# Altium PCB Placa_Alimentación_v2.PcbDoc
Units mil, origin at the board's own origin, x right, y up, seen from the top; angles counter-clockwise.
Board outline 3937.01 x 2755.91 mil, 2 copper layers (Top Layer, Bottom Layer); 155 components, 79 nets, 550 pads, 0 vias.
Unrouted connection lines stored in the file: 384.
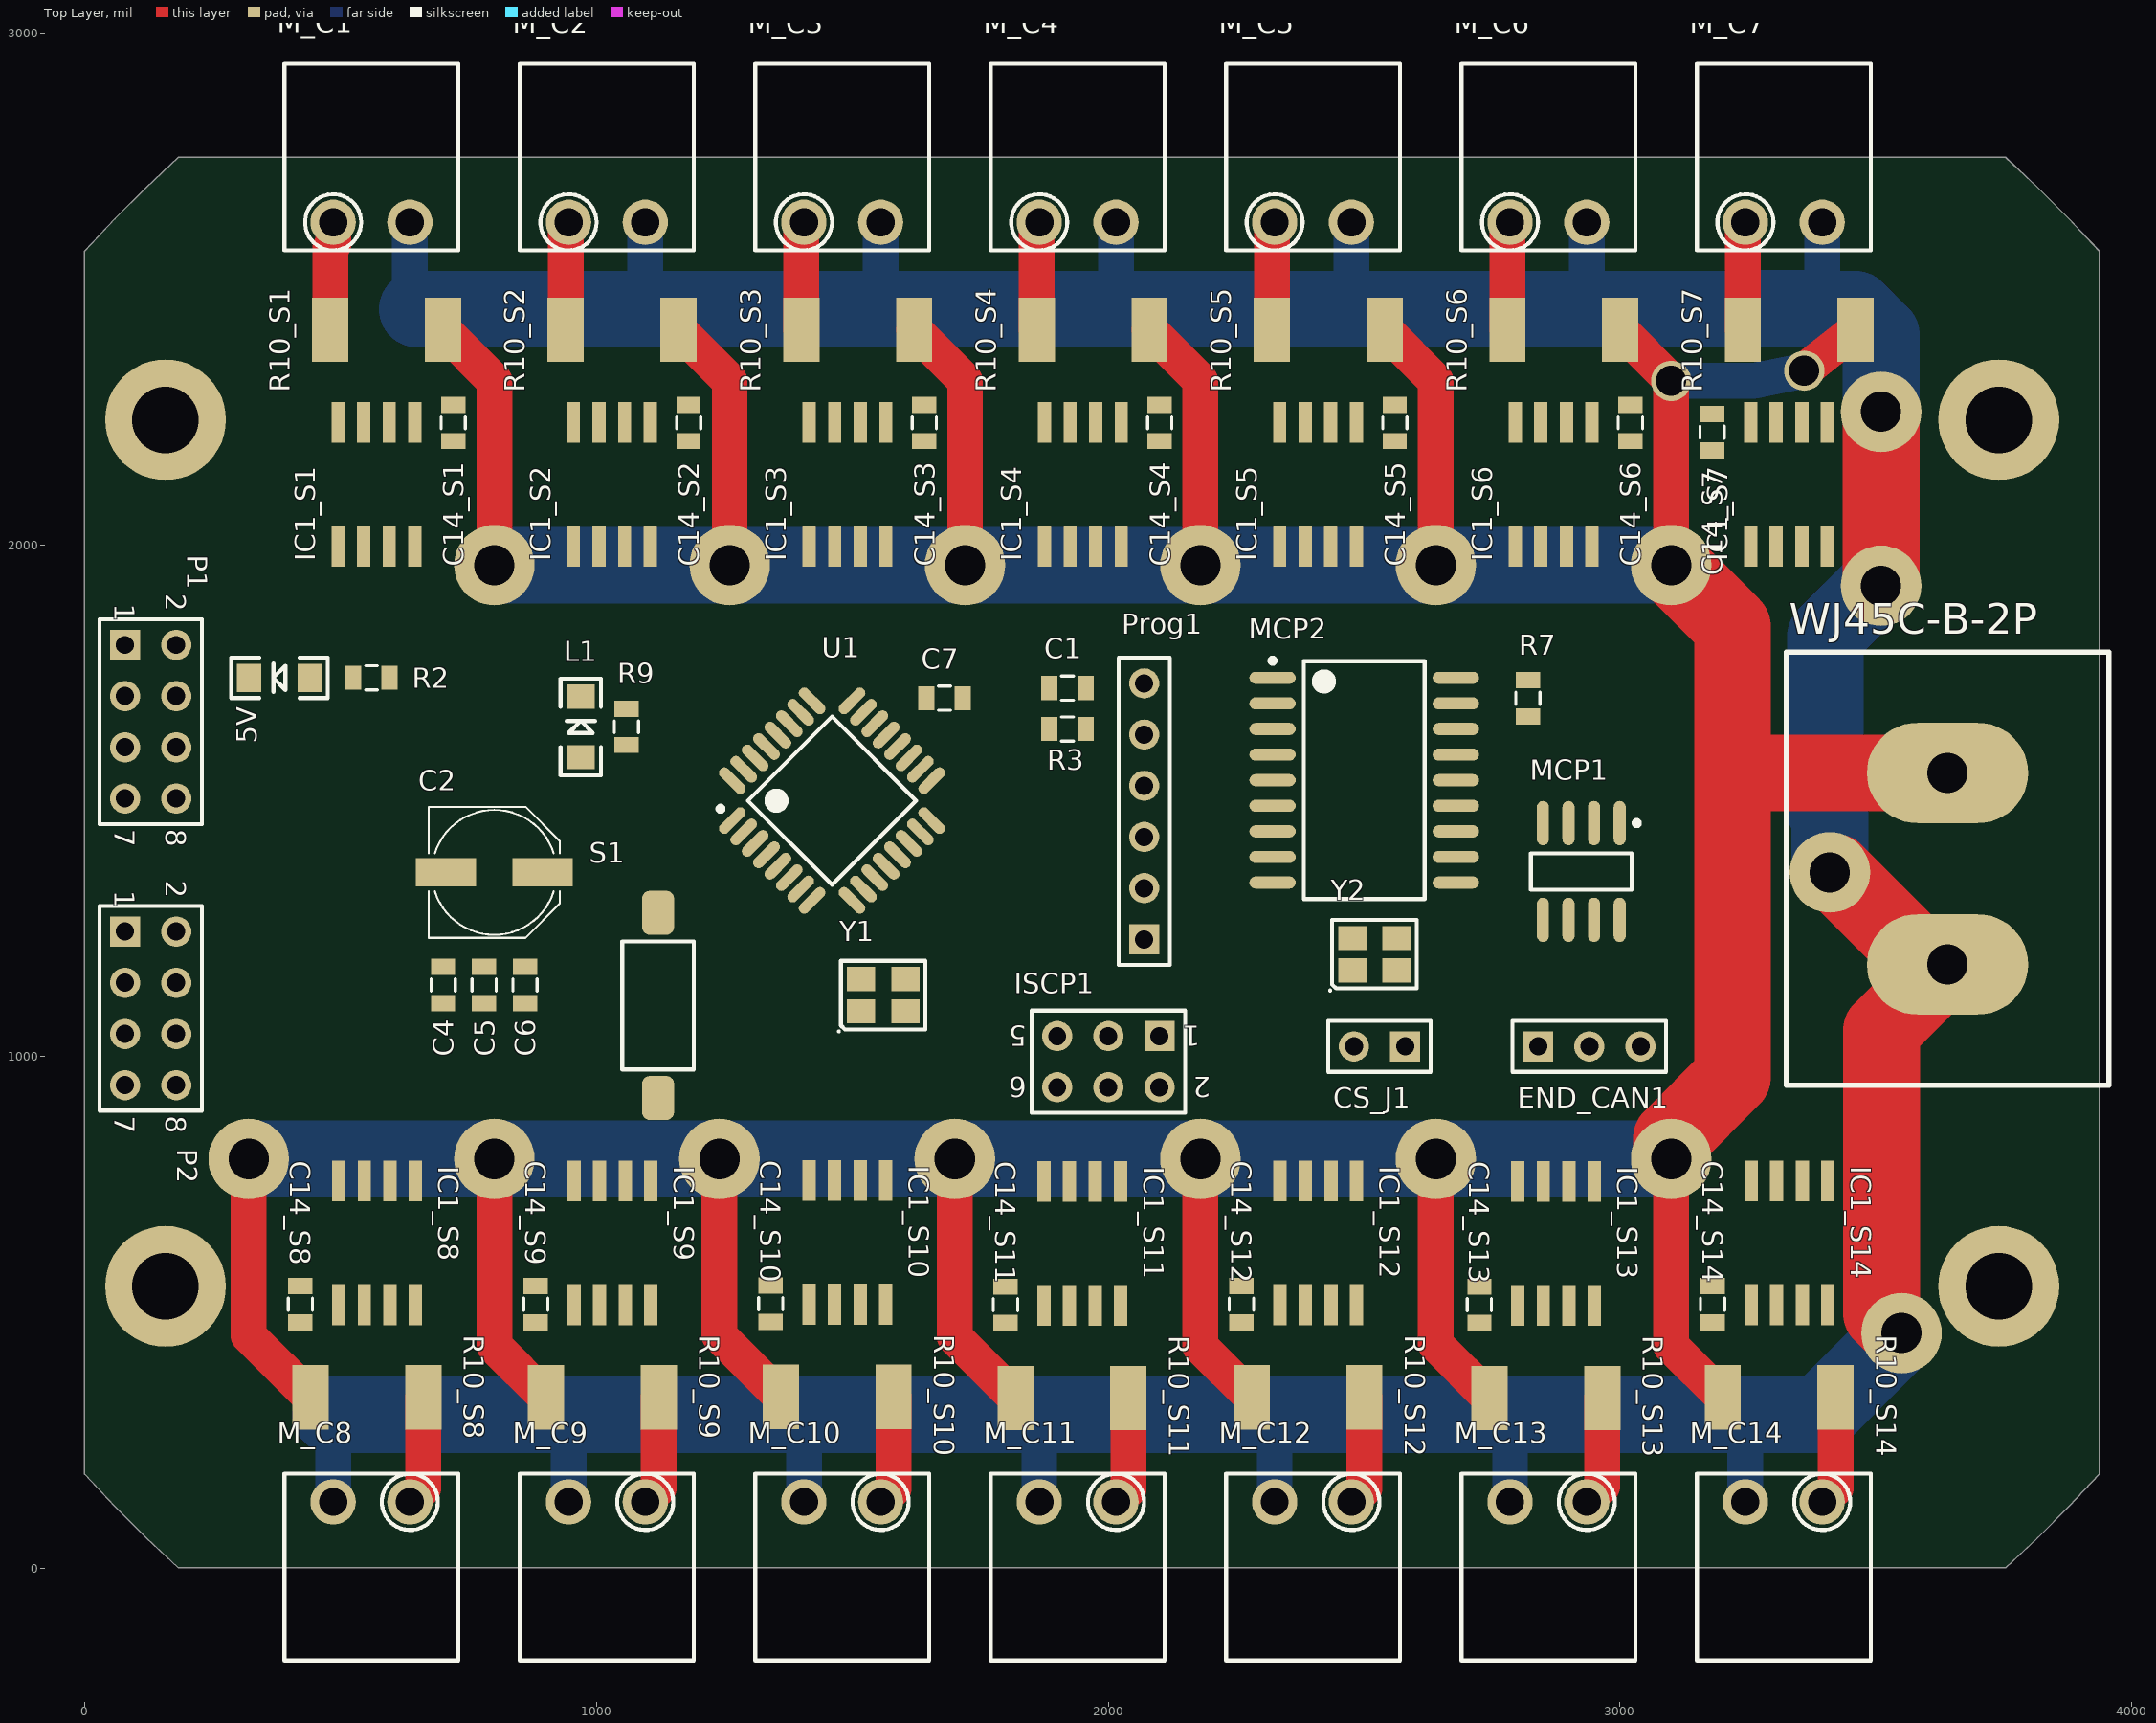
[diagram p0: Top Layer view]
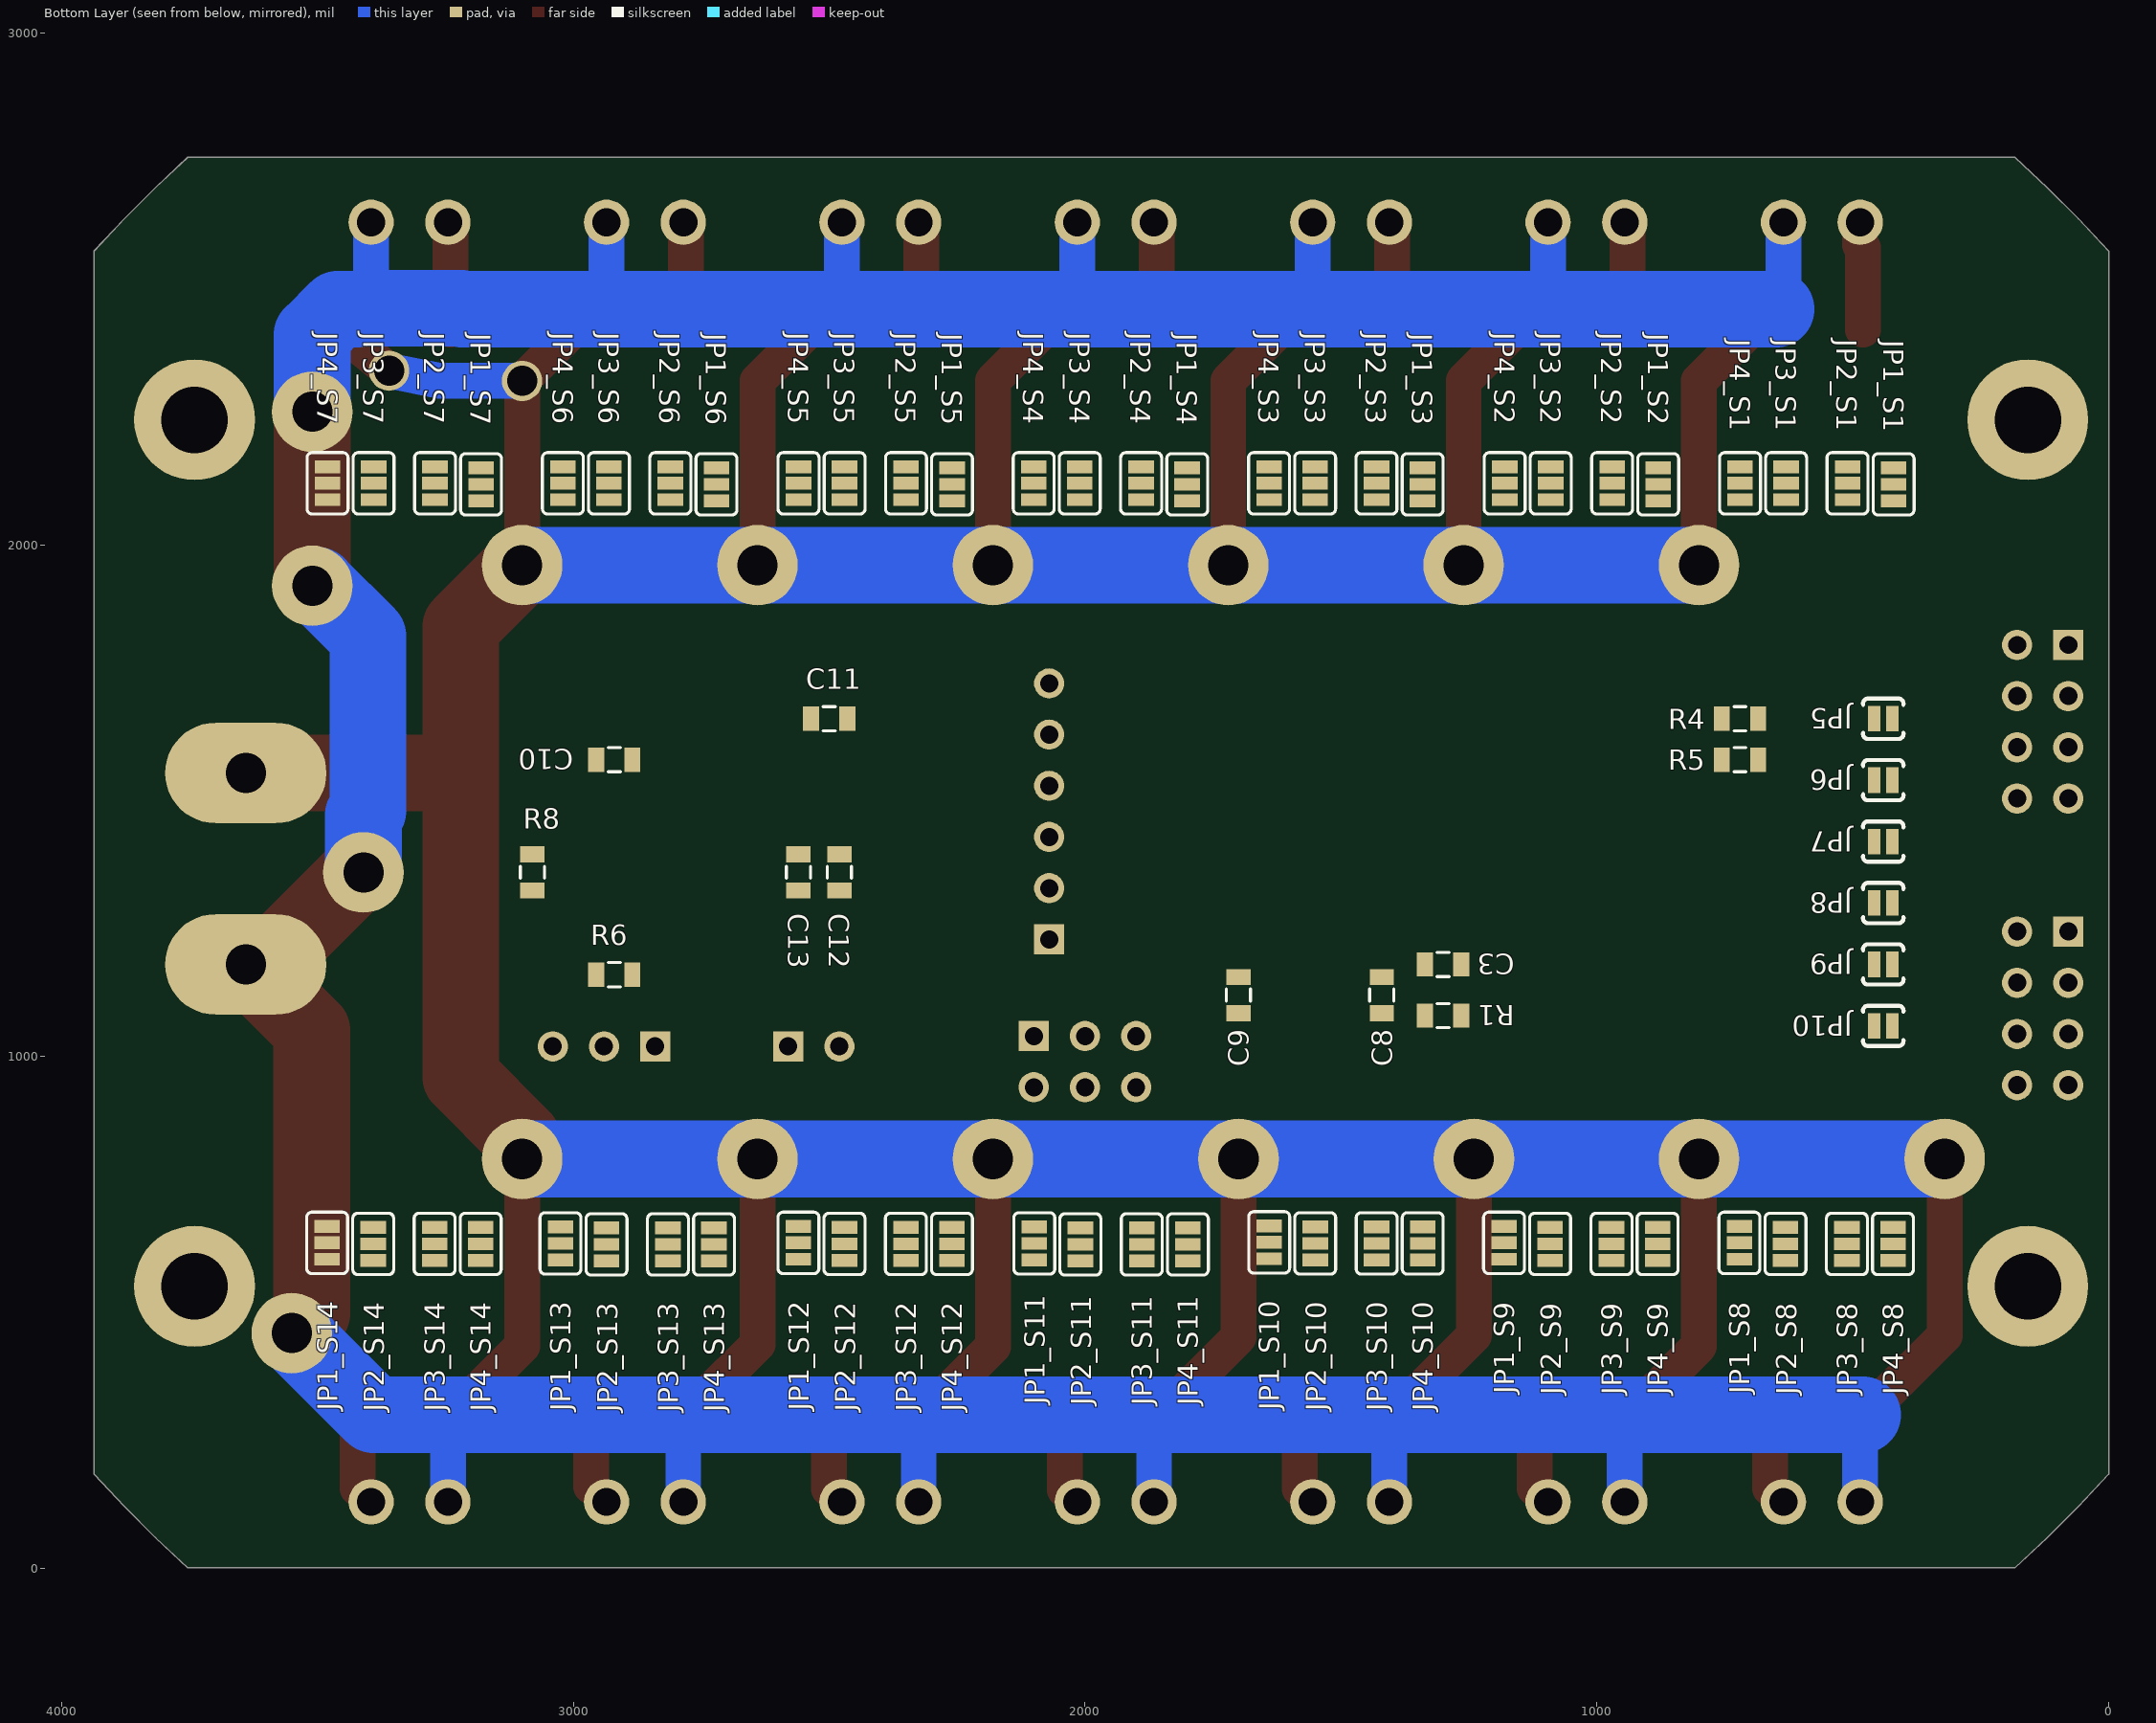
[diagram p1: Bottom Layer view, seen from below]

## Layer stack, top to bottom
Top Solder: solder mask 0.4, Solder Resist, Dk 3.5
Top Layer: signal copper 1.4
Dielectric 1: dielectric 12.6, FR-4, Dk 4.8
Bottom Layer: signal copper 1.4
Bottom Solder: solder mask 0.4, Solder Resist, Dk 3.5

## Board outline
-0.63,1954.22 -0.63,2573.72 58.46,2636.76 119.54,2697.84 182.57,2756.93 3753.17,2756.93 3816.21,2697.84 3877.29,2636.76 3936.38,2573.72 3936.38,184.23 3877.29,121.2 3816.21,60.11 3753.17,1.02 182.57,1.02 119.54,60.11 58.46,121.2 -0.63,184.23

## Design rules (kind name [scope] priority, off if disabled: settings)
BoardOutlineClearance [All] p1: gap=39.37 ignorepadtopadclearanceinfootprint=FALSE
Clearance Clearance_2 [InNamedPolygon('GND TOP PLANE')] p1: gap=10 ignorepadtopadclearanceinfootprint=FALSE except(0: Arc-Hole Track-Hole SMDPad-Hole THPad-Hole Via-Hole Fill-Hole Poly-Hole Region-Hole Text-Hole)
Clearance Clearance_1 [InNamedPolygon('GND BOTTOM PLANE')] p2: gap=10 ignorepadtopadclearanceinfootprint=FALSE except(0: Arc-Hole Track-Hole SMDPad-Hole THPad-Hole Via-Hole Fill-Hole Poly-Hole Region-Hole Text-Hole)
Clearance [All] p3: gap=6 ignorepadtopadclearanceinfootprint=FALSE
Clearance Clearance_POWER [InNet('24V') vs InNet('PGND')] p4: gap=15 ignorepadtopadclearanceinfootprint=FALSE
HoleSize [All] p1: absolutevalues=TRUE maxlimit=248.03 minlimit=11.81 maxpercent=80.000 minpercent=20.000
PlaneClearance [All] p1: clearance=197.48
PolygonConnect [All] p1: connectstyle=Relief reliefconductorwidth=10 reliefentries=4 polygonreliefangle="90 Angle" airgapwidth=10
RoomDefinition S14 [InComponentClass('S14')] p1: confinementstyle=ConfineIn formatcopy=TRUE lockcomponents=FALSE outline 3576,837 3046,837 3046,217 3576,217
RoomDefinition S13 [InComponentClass('S13')] p2: confinementstyle=ConfineIn formatcopy=TRUE lockcomponents=FALSE outline 3120,836 2590,836 2590,216 3120,216
RoomDefinition S12 [InComponentClass('S12')] p3: confinementstyle=ConfineIn formatcopy=TRUE lockcomponents=FALSE outline 2655,837 2125,837 2125,217 2655,217
RoomDefinition S11 [InComponentClass('S11')] p4: confinementstyle=ConfineIn formatcopy=TRUE lockcomponents=FALSE outline 2194,836 1664,836 1664,216 2194,216
RoomDefinition S10 [InComponentClass('S10')] p5: confinementstyle=ConfineIn formatcopy=TRUE lockcomponents=FALSE outline 1735,838 1205,838 1205,218 1735,218
RoomDefinition S9 [InComponentClass('S9')] p6: confinementstyle=ConfineIn formatcopy=TRUE lockcomponents=FALSE outline 1276,837 746,837 746,217 1276,217
RoomDefinition S8 [InComponentClass('S8')] p7: confinementstyle=ConfineIn formatcopy=TRUE lockcomponents=FALSE outline 816,837 286,837 286,217 816,217
RoomDefinition S7 [InComponentClass('S7')] p8: confinementstyle=ConfineIn formatcopy=TRUE lockcomponents=FALSE outline 3080.24,1918 3610.24,1918 3610.24,2538 3080.24,2538
RoomDefinition S6 [InComponentClass('S6')] p9: confinementstyle=ConfineIn formatcopy=TRUE lockcomponents=FALSE outline 2620.24,1918 3150.24,1918 3150.24,2538 2620.24,2538
RoomDefinition S5 [InComponentClass('S5')] p10: confinementstyle=ConfineIn formatcopy=TRUE lockcomponents=FALSE outline 2159.76,1918 2689.76,1918 2689.76,2538 2159.76,2538
RoomDefinition S4 [InComponentClass('S4')] p11: confinementstyle=ConfineIn formatcopy=TRUE lockcomponents=FALSE outline 1700.24,1918 2230.24,1918 2230.24,2538 1700.24,2538
RoomDefinition S3 [InComponentClass('S3')] p12: confinementstyle=ConfineIn formatcopy=TRUE lockcomponents=FALSE outline 1240.24,1918 1770.24,1918 1770.24,2538 1240.24,2538
RoomDefinition S2 [InComponentClass('S2')] p13: confinementstyle=ConfineIn formatcopy=TRUE lockcomponents=FALSE outline 779.76,1918 1309.76,1918 1309.76,2538 779.76,2538
RoomDefinition S1 [InComponentClass('S1')] p14: confinementstyle=ConfineIn formatcopy=TRUE lockcomponents=FALSE outline 319.76,1918 849.76,1918 849.76,2538 319.76,2538
RoutingVias [All] p1: holewidth=15.75 width=27.56 viastyle="Through Hole" minholewidth=11.81 minwidth=23.62 maxholewidth=78.74 maxwidth=118.11
SMDNeckDown [All] p1: percent=100.000
SilkToSilkClearance [All] p1 off: silktosilkclearance=5
SolderMaskExpansion [All] p1: expansion=4
Width Width_Motor1 [InNet('MOTOR1')] p1: maxlimit=35 minlimit=15 preferedwidth=35
Width Width_Motor2 [InNet('MOTOR2')] p2: maxlimit=35 minlimit=15 preferedwidth=35
Width Width_24V [InNet('24V')] p3: maxlimit=200 minlimit=15 preferedwidth=35
Width Width_PGND [InNet('PGND')] p4: maxlimit=200 minlimit=15 preferedwidth=35
Width Width_VCC [InNet('VCC')] p5: maxlimit=20 minlimit=10 preferedwidth=20 checkconnectedcopper=TRUE
Width Width_GND [InNet('GND')] p6: maxlimit=200 minlimit=10 preferedwidth=20 checkconnectedcopper=TRUE
Width Width_5V [InNet('5V')] p7: maxlimit=15 minlimit=10 preferedwidth=15 checkconnectedcopper=TRUE
Width [All] p8: maxlimit=200 minlimit=10 preferedwidth=10
27 further rules are at their usual default settings.

## Classes and differential pairs
net class Motor_Bus[1..14]: Motor_Bus1 Motor_Bus2 Motor_Bus3 Motor_Bus4 Motor_Bus5 Motor_Bus6 Motor_Bus7 Motor_Bus8 Motor_Bus9 Motor_Bus10 Motor_Bus11 Motor_Bus12 Motor_Bus13 Motor_Bus14
channel class Sensor_Conjunto: S1 S2 S3 S4 S5 S6 S7 S8 S9 S10 S11 S12 S13 S14 S15 S16
channel class Conector_Motor: C1 C2 C3 C4 C5 C6 C7 C8 C9 C10 C11 C12 C13 C14 C15 C16
component class S14: C14_S14 IC1_S14 JP1_S14 JP2_S14 JP3_S14 JP4_S14 R10_S14
component class S13: C14_S13 IC1_S13 JP1_S13 JP2_S13 JP3_S13 JP4_S13 R10_S13
component class S12: C14_S12 IC1_S12 JP1_S12 JP2_S12 JP3_S12 JP4_S12 R10_S12
component class S11: C14_S11 IC1_S11 JP1_S11 JP2_S11 JP3_S11 JP4_S11 R10_S11
component class S10: C14_S10 IC1_S10 JP1_S10 JP2_S10 JP3_S10 JP4_S10 R10_S10
component class S9: C14_S9 IC1_S9 JP1_S9 JP2_S9 JP3_S9 JP4_S9 R10_S9
component class S8: C14_S8 IC1_S8 JP1_S8 JP2_S8 JP3_S8 JP4_S8 R10_S8
component class S7: C14_S7 IC1_S7 JP1_S7 JP2_S7 JP3_S7 JP4_S7 R10_S7
component class S6: C14_S6 IC1_S6 JP1_S6 JP2_S6 JP3_S6 JP4_S6 R10_S6
component class S5: C14_S5 IC1_S5 JP1_S5 JP2_S5 JP3_S5 JP4_S5 R10_S5
component class S4: C14_S4 IC1_S4 JP1_S4 JP2_S4 JP3_S4 JP4_S4 R10_S4
component class S3: C14_S3 IC1_S3 JP1_S3 JP2_S3 JP3_S3 JP4_S3 R10_S3
component class S2: C14_S2 IC1_S2 JP1_S2 JP2_S2 JP3_S2 JP4_S2 R10_S2
component class S1: C14_S1 IC1_S1 JP1_S1 JP2_S1 JP3_S1 JP4_S1 R10_S1
component class Placa_Alimentación: 5V C1 C2 C3 C4 C5 C6 C7 C8 C9 C10 C11 C12 C13 CS_J1 END_CAN1 ISCP1 JP5 JP6 JP7 JP8 JP9 JP10 L1 MCP1 MCP2 P1 P2 Prog1 R1 R2 R3 R4 R5 R6 R7 R8 R9 S1 U1 WJ45C-B-2P Y1 Y2
component class C14: M_C14
component class C13: M_C13
component class C12: M_C12
component class C11: M_C11
component class C10: M_C10
component class C9: M_C9
component class C8: M_C8
component class C7: M_C7
component class C6: M_C6
component class C5: M_C5
component class C4: M_C4
component class C3: M_C3
component class C2: M_C2
component class C1: M_C1

## Components (designator, comment, footprint, x,y, rotation, side; value= is the part's Value field where it differs from the comment)
5V "1206 LED" LED-1206 380,1740 r180 top
C1 "100n" 0805 1920,1720 r0 top
C2 "47uF" PANASONIC_D 800,1360 r0 top
C3 "22p" 0805 1300,1180 r0 bottom
C4 "100n" 0805 700,1140 r90 top
C5 "100n" 0805 780,1140 r90 top
C6 "100n" 0805 860,1140 r90 top
C7 "100n" 0805 1680,1700 r180 top
C8 "22p" 0805 1420,1120 r90 bottom
C9 "22p" 0805 1700,1120 r270 bottom
C10 "100n" 0805 2920,1580 r0 bottom
C11 "100n" 0805 2500,1660 r180 bottom
C12 "22p" 0805 2480,1360 r270 bottom
C13 "22p" 0805 2560,1360 r90 bottom
C14_S1 "100n" 0805 719.76,2238 r270 top (schematic designator C14)
C14_S2 "100n" 0805 1179.76,2238 r270 top (schematic designator C14)
C14_S3 "100n" 0805 1640.24,2238 r270 top (schematic designator C14)
C14_S4 "100n" 0805 2100.24,2238 r270 top (schematic designator C14)
C14_S5 "100n" 0805 2559.76,2238 r270 top (schematic designator C14)
C14_S6 "100n" 0805 3020.24,2238 r270 top (schematic designator C14)
C14_S7 "100n" 0805 3180,2220 r270 top (schematic designator C14)
C14_S8 "100n" 0805 421,516 r90 top (schematic designator C14)
C14_S9 "100n" 0805 881,516 r90 top (schematic designator C14)
C14_S10 "100n" 0805 1340,517 r90 top (schematic designator C14)
C14_S11 "100n" 0805 1799,515 r90 top (schematic designator C14)
C14_S12 "100n" 0805 2260,516 r90 top (schematic designator C14)
C14_S13 "100n" 0805 2725,515 r90 top (schematic designator C14)
C14_S14 "100n" 0805 3181,516 r90 top (schematic designator C14)
CS_J1 "Header 2" HDR1X2 2580,1020 r180 top
END_CAN1 "Header 3" HDR1X3 2840,1020 r0 top
IC1_S1 "INA219" SO08 569.76,2118 r90 top (schematic designator IC1)
IC1_S2 "INA219" SO08 1029.76,2118 r90 top (schematic designator IC1)
IC1_S3 "INA219" SO08 1490.24,2118 r90 top (schematic designator IC1)
IC1_S4 "INA219" SO08 1950.24,2118 r90 top (schematic designator IC1)
IC1_S5 "INA219" SO08 2409.76,2118 r90 top (schematic designator IC1)
IC1_S6 "INA219" SO08 2870.24,2118 r90 top (schematic designator IC1)
IC1_S7 "INA219" SO08 3330.24,2118 r90 top (schematic designator IC1)
IC1_S8 "INA219" SO08 571,636 r270 top (schematic designator IC1)
IC1_S9 "INA219" SO08 1031,636 r270 top (schematic designator IC1)
IC1_S10 "INA219" SO08 1490,637 r270 top (schematic designator IC1)
IC1_S11 "INA219" SO08 1949,635 r270 top (schematic designator IC1)
IC1_S12 "INA219" SO08 2410,636 r270 top (schematic designator IC1)
IC1_S13 "INA219" SO08 2875,635 r270 top (schematic designator IC1)
IC1_S14 "INA219" SO08 3331,636 r270 top (schematic designator IC1)
ISCP1 "Header 3X2" HDR2X3 2100,1040 r180 top
JP1_S1 "JUMPER-PAD-3-NOYES_SILK" PAD-JUMPER-3-NO_YES_SILK 419.76,2118 r270 bottom (schematic designator JP1)
JP1_S2 "JUMPER-PAD-3-NOYES_SILK" PAD-JUMPER-3-NO_YES_SILK 879.76,2118 r270 bottom (schematic designator JP1)
JP1_S3 "JUMPER-PAD-3-NOYES_SILK" PAD-JUMPER-3-NO_YES_SILK 1340.24,2118 r270 bottom (schematic designator JP1)
JP1_S4 "JUMPER-PAD-3-NOYES_SILK" PAD-JUMPER-3-NO_YES_SILK 1800.24,2118 r270 bottom (schematic designator JP1)
JP1_S5 "JUMPER-PAD-3-NOYES_SILK" PAD-JUMPER-3-NO_YES_SILK 2259.76,2118 r270 bottom (schematic designator JP1)
JP1_S6 "JUMPER-PAD-3-NOYES_SILK" PAD-JUMPER-3-NO_YES_SILK 2720.24,2118 r270 bottom (schematic designator JP1)
JP1_S7 "JUMPER-PAD-3-NOYES_SILK" PAD-JUMPER-3-NO_YES_SILK 3180.24,2118 r270 bottom (schematic designator JP1)
JP1_S8 "JUMPER-PAD-3-NOYES_SILK" PAD-JUMPER-3-NO_YES_SILK 721,636 r90 bottom (schematic designator JP1)
JP1_S9 "JUMPER-PAD-3-NOYES_SILK" PAD-JUMPER-3-NO_YES_SILK 1181,636 r90 bottom (schematic designator JP1)
JP1_S10 "JUMPER-PAD-3-NOYES_SILK" PAD-JUMPER-3-NO_YES_SILK 1640,637 r90 bottom (schematic designator JP1)
JP1_S11 "JUMPER-PAD-3-NOYES_SILK" PAD-JUMPER-3-NO_YES_SILK 2099,635 r90 bottom (schematic designator JP1)
JP1_S12 "JUMPER-PAD-3-NOYES_SILK" PAD-JUMPER-3-NO_YES_SILK 2560,636 r90 bottom (schematic designator JP1)
JP1_S13 "JUMPER-PAD-3-NOYES_SILK" PAD-JUMPER-3-NO_YES_SILK 3025,635 r90 bottom (schematic designator JP1)
JP1_S14 "JUMPER-PAD-3-NOYES_SILK" PAD-JUMPER-3-NO_YES_SILK 3481,636 r90 bottom (schematic designator JP1)
JP2_S1 "JUMPER-PAD-3-NOYES_SILK" PAD-JUMPER-3-NO_YES_SILK 509.76,2120 r270 bottom (schematic designator JP2)
JP2_S2 "JUMPER-PAD-3-NOYES_SILK" PAD-JUMPER-3-NO_YES_SILK 969.76,2120 r270 bottom (schematic designator JP2)
JP2_S3 "JUMPER-PAD-3-NOYES_SILK" PAD-JUMPER-3-NO_YES_SILK 1430.24,2120 r270 bottom (schematic designator JP2)
JP2_S4 "JUMPER-PAD-3-NOYES_SILK" PAD-JUMPER-3-NO_YES_SILK 1890.24,2120 r270 bottom (schematic designator JP2)
JP2_S5 "JUMPER-PAD-3-NOYES_SILK" PAD-JUMPER-3-NO_YES_SILK 2349.76,2120 r270 bottom (schematic designator JP2)
JP2_S6 "JUMPER-PAD-3-NOYES_SILK" PAD-JUMPER-3-NO_YES_SILK 2810.24,2120 r270 bottom (schematic designator JP2)
JP2_S7 "JUMPER-PAD-3-NOYES_SILK" PAD-JUMPER-3-NO_YES_SILK 3270.24,2120 r270 bottom (schematic designator JP2)
JP2_S8 "JUMPER-PAD-3-NOYES_SILK" PAD-JUMPER-3-NO_YES_SILK 631,634 r90 bottom (schematic designator JP2)
JP2_S9 "JUMPER-PAD-3-NOYES_SILK" PAD-JUMPER-3-NO_YES_SILK 1091,634 r90 bottom (schematic designator JP2)
JP2_S10 "JUMPER-PAD-3-NOYES_SILK" PAD-JUMPER-3-NO_YES_SILK 1550,635 r90 bottom (schematic designator JP2)
JP2_S11 "JUMPER-PAD-3-NOYES_SILK" PAD-JUMPER-3-NO_YES_SILK 2009,633 r90 bottom (schematic designator JP2)
JP2_S12 "JUMPER-PAD-3-NOYES_SILK" PAD-JUMPER-3-NO_YES_SILK 2470,634 r90 bottom (schematic designator JP2)
JP2_S13 "JUMPER-PAD-3-NOYES_SILK" PAD-JUMPER-3-NO_YES_SILK 2935,633 r90 bottom (schematic designator JP2)
JP2_S14 "JUMPER-PAD-3-NOYES_SILK" PAD-JUMPER-3-NO_YES_SILK 3391,634 r90 bottom (schematic designator JP2)
JP3_S1 "JUMPER-PAD-3-NOYES_SILK" PAD-JUMPER-3-NO_YES_SILK 629.76,2120 r270 bottom (schematic designator JP3)
JP3_S2 "JUMPER-PAD-3-NOYES_SILK" PAD-JUMPER-3-NO_YES_SILK 1089.76,2120 r270 bottom (schematic designator JP3)
JP3_S3 "JUMPER-PAD-3-NOYES_SILK" PAD-JUMPER-3-NO_YES_SILK 1550.24,2120 r270 bottom (schematic designator JP3)
JP3_S4 "JUMPER-PAD-3-NOYES_SILK" PAD-JUMPER-3-NO_YES_SILK 2010.24,2120 r270 bottom (schematic designator JP3)
JP3_S5 "JUMPER-PAD-3-NOYES_SILK" PAD-JUMPER-3-NO_YES_SILK 2469.76,2120 r270 bottom (schematic designator JP3)
JP3_S6 "JUMPER-PAD-3-NOYES_SILK" PAD-JUMPER-3-NO_YES_SILK 2930.24,2120 r270 bottom (schematic designator JP3)
JP3_S7 "JUMPER-PAD-3-NOYES_SILK" PAD-JUMPER-3-NO_YES_SILK 3390.24,2120 r270 bottom (schematic designator JP3)
JP3_S8 "JUMPER-PAD-3-NOYES_SILK" PAD-JUMPER-3-NO_YES_SILK 511,634 r90 bottom (schematic designator JP3)
JP3_S9 "JUMPER-PAD-3-NOYES_SILK" PAD-JUMPER-3-NO_YES_SILK 971,634 r90 bottom (schematic designator JP3)
JP3_S10 "JUMPER-PAD-3-NOYES_SILK" PAD-JUMPER-3-NO_YES_SILK 1430,635 r90 bottom (schematic designator JP3)
JP3_S11 "JUMPER-PAD-3-NOYES_SILK" PAD-JUMPER-3-NO_YES_SILK 1889,633 r90 bottom (schematic designator JP3)
JP3_S12 "JUMPER-PAD-3-NOYES_SILK" PAD-JUMPER-3-NO_YES_SILK 2350,634 r90 bottom (schematic designator JP3)
JP3_S13 "JUMPER-PAD-3-NOYES_SILK" PAD-JUMPER-3-NO_YES_SILK 2815,633 r90 bottom (schematic designator JP3)
JP3_S14 "JUMPER-PAD-3-NOYES_SILK" PAD-JUMPER-3-NO_YES_SILK 3271,634 r90 bottom (schematic designator JP3)
JP4_S1 "JUMPER-PAD-3-NOYES_SILK" PAD-JUMPER-3-NO_YES_SILK 719.76,2120 r270 bottom (schematic designator JP4)
JP4_S2 "JUMPER-PAD-3-NOYES_SILK" PAD-JUMPER-3-NO_YES_SILK 1179.76,2120 r270 bottom (schematic designator JP4)
JP4_S3 "JUMPER-PAD-3-NOYES_SILK" PAD-JUMPER-3-NO_YES_SILK 1640.24,2120 r270 bottom (schematic designator JP4)
JP4_S4 "JUMPER-PAD-3-NOYES_SILK" PAD-JUMPER-3-NO_YES_SILK 2100.24,2120 r270 bottom (schematic designator JP4)
JP4_S5 "JUMPER-PAD-3-NOYES_SILK" PAD-JUMPER-3-NO_YES_SILK 2559.76,2120 r270 bottom (schematic designator JP4)
JP4_S6 "JUMPER-PAD-3-NOYES_SILK" PAD-JUMPER-3-NO_YES_SILK 3020.24,2120 r270 bottom (schematic designator JP4)
JP4_S7 "JUMPER-PAD-3-NOYES_SILK" PAD-JUMPER-3-NO_YES_SILK 3480.24,2120 r270 bottom (schematic designator JP4)
JP4_S8 "JUMPER-PAD-3-NOYES_SILK" PAD-JUMPER-3-NO_YES_SILK 421,634 r90 bottom (schematic designator JP4)
JP4_S9 "JUMPER-PAD-3-NOYES_SILK" PAD-JUMPER-3-NO_YES_SILK 881,634 r90 bottom (schematic designator JP4)
JP4_S10 "JUMPER-PAD-3-NOYES_SILK" PAD-JUMPER-3-NO_YES_SILK 1340,635 r90 bottom (schematic designator JP4)
JP4_S11 "JUMPER-PAD-3-NOYES_SILK" PAD-JUMPER-3-NO_YES_SILK 1799,633 r90 bottom (schematic designator JP4)
JP4_S12 "JUMPER-PAD-3-NOYES_SILK" PAD-JUMPER-3-NO_YES_SILK 2260,634 r90 bottom (schematic designator JP4)
JP4_S13 "JUMPER-PAD-3-NOYES_SILK" PAD-JUMPER-3-NO_YES_SILK 2725,633 r90 bottom (schematic designator JP4)
JP4_S14 "JUMPER-PAD-3-NOYES_SILK" PAD-JUMPER-3-NO_YES_SILK 3181,634 r90 bottom (schematic designator JP4)
JP5 "JUMPER-PAD-2-NOYES_SILK" PAD-JUMPER-2-NO_YES_SILK 440,1660 r0 bottom
JP6 "JUMPER-PAD-2-NOYES_SILK" PAD-JUMPER-2-NO_YES_SILK 440,1540 r0 bottom
JP7 "JUMPER-PAD-2-NOYES_SILK" PAD-JUMPER-2-NO_YES_SILK 440,1420 r180 bottom
JP8 "JUMPER-PAD-2-NOYES_SILK" PAD-JUMPER-2-NO_YES_SILK 440,1300 r0 bottom
JP9 "JUMPER-PAD-2-NOYES_SILK" PAD-JUMPER-2-NO_YES_SILK 440,1180 r0 bottom
JP10 "JUMPER-PAD-2-NOYES_SILK" PAD-JUMPER-2-NO_YES_SILK 440,1060 r0 bottom
L1 "1206 LED" LED-1206 969,1644 r90 top
M_C1 "20020110-D021A01LF" "FCI 06-381-2PIN" 560,2760 r0 top (schematic designator M)
M_C2 "20020110-D021A01LF" "FCI 06-381-2PIN" 1020,2760 r0 top (schematic designator M)
M_C3 "20020110-D021A01LF" "FCI 06-381-2PIN" 1480,2760 r0 top (schematic designator M)
M_C4 "20020110-D021A01LF" "FCI 06-381-2PIN" 1940,2760 r0 top (schematic designator M)
M_C5 "20020110-D021A01LF" "FCI 06-381-2PIN" 2400,2760 r0 top (schematic designator M)
M_C6 "20020110-D021A01LF" "FCI 06-381-2PIN" 2860,2760 r0 top (schematic designator M)
M_C7 "20020110-D021A01LF" "FCI 06-381-2PIN" 3320,2760 r0 top (schematic designator M)
M_C8 "20020110-D021A01LF" "FCI 06-381-2PIN" 560,0 r180 top (schematic designator M)
M_C9 "20020110-D021A01LF" "FCI 06-381-2PIN" 1020,0 r180 top (schematic designator M)
M_C10 "20020110-D021A01LF" "FCI 06-381-2PIN" 1480,0 r180 top (schematic designator M)
M_C11 "20020110-D021A01LF" "FCI 06-381-2PIN" 1940,0 r180 top (schematic designator M)
M_C12 "20020110-D021A01LF" "FCI 06-381-2PIN" 2400,0 r180 top (schematic designator M)
M_C13 "20020110-D021A01LF" "FCI 06-381-2PIN" 2860,0 r180 top (schematic designator M)
M_C14 "20020110-D021A01LF" "FCI 06-381-2PIN" 3320,0 r180 top (schematic designator M)
MCP1 "MCP2551T-I/SN" SOIC-SN8_N 2924.23,1361.63 r270 top
MCP2 "MCP2515T-E/SO" SOIC-SO18_N 2500,1540 r0 top
P1 "Header 4X2" HDR2X4 78.37,1804.23 r270 top
P2 "Header 4X2" HDR2X4 78.37,1244.23 r270 top
Prog1 "Header 6" HDR1X6 2070,1229 r90 top
R1 "10K" 0805 1300,1080 r0 bottom
R2 "500" 0805 560,1740 r0 top
R3 "10K" 0805 1920,1640 r180 top
R4 "0" 0805 720,1660 r180 bottom
R5 "0" 0805 720,1580 r180 bottom
R6 "124" 0805 2920,1160 r180 bottom
R7 "10K" 0805 2820,1700 r90 top
R8 "4.7K" 0805 3080,1360 r270 bottom
R9 "500" 0805 1058.37,1644.23 r90 top
R10_S1 "0.012 2W" R2512 589.76,2420 r0 top (schematic designator R10)
R10_S2 "0.012 2W" R2512 1049.76,2420 r0 top (schematic designator R10)
R10_S3 "0.012 2W" R2512 1510.24,2420 r0 top (schematic designator R10)
R10_S4 "0.012 2W" R2512 1970.24,2420 r0 top (schematic designator R10)
R10_S5 "0.012 2W" R2512 2429.76,2420 r0 top (schematic designator R10)
R10_S6 "0.012 2W" R2512 2890.24,2420 r0 top (schematic designator R10)
R10_S7 "0.012 2W" R2512 3350.24,2420 r0 top (schematic designator R10)
R10_S8 "0.012 2W" R2512 551,334 r180 top (schematic designator R10)
R10_S9 "0.012 2W" R2512 1011,334 r180 top (schematic designator R10)
R10_S10 "0.012 2W" R2512 1470,335 r180 top (schematic designator R10)
R10_S11 "0.012 2W" R2512 1929,333 r180 top (schematic designator R10)
R10_S12 "0.012 2W" R2512 2390,334 r180 top (schematic designator R10)
R10_S13 "0.012 2W" R2512 2855,333 r180 top (schematic designator R10)
R10_S14 "0.012 2W" R2512 3311,334 r180 top (schematic designator R10)
S1 "FSMSMTR" "TE FSMSMTR" 1120,1100 r180 top
U1 "ATmega328P-AU" 32A_N 1460,1500 r45 top
WJ45C-B-2P "WJ45C-B-2P" WJ45C-B-2P 3640,1180 r90 top
Y1 "16MHz" "NDK NX3225SA" 1560,1120 r0 top
Y2 "16MHz" "NDK NX3225SA" 2520,1200 r0 top

## Footprints (in the part's own frame and the unit in brackets; to place one, negate y for a bottom-side part, rotate by r counter-clockwise, add the part's x,y. Pads: shape width x height; smd on the part's side, far side on the other; paste and mask are expansions set on the pad)
32A_N [mm] "Thin QFP, 32-Leads, Body 7x7mm, Pitch 0.8mm, IPC Medium Density"
  oval 1.65x0.55 smd: 1(-4.2,2.8) 2(-4.2,2) 3(-4.2,1.2) 4(-4.2,0.4) 5(-4.2,-0.4) 6(-4.2,-1.2) 7(-4.2,-2) 8(-4.2,-2.8) 17(4.2,-2.8) 18(4.2,-2) 19(4.2,-1.2) 20(4.2,-0.4) 21(4.2,0.4) 22(4.2,1.2) 23(4.2,2) 24(4.2,2.8)
  oval 0.55x1.65 smd: 9(-2.8,-4.2) 10(-2,-4.2) 11(-1.2,-4.2) 12(-0.4,-4.2) 13(0.4,-4.2) 14(1.2,-4.2) 15(2,-4.2) 16(2.8,-4.2) 25(2.8,4.2) 26(2,4.2) 27(1.2,4.2) 28(0.4,4.2) 29(-0.4,4.2) 30(-1.2,4.2) 31(-2,4.2) 32(-2.8,4.2)
  silkscreen extent -4.32,-2.95 2.95,3.75, body extent -3.5,-3.5 3.5,3.5, height 1.2
0805 [mil]
  rect 31.5x47.24 smd: 1(-35.43,0) 2(35.43,0)
  silkscreen extent -12,-24 12,24
"FCI 06-381-2PIN" [mm] "FCI Pluggable Terminal Block"
  round 2.25 hole 1.4: 1(-1.905,-3.302) 2(1.905,-3.302)
  silkscreen extent -4.32,-4.7 4.32,4.57, body extent -4.4,-4.7 4.4,4.5, height 7.6
HDR1X2 [mm] "Connector; Header; 2 Position"
  rect 1.5x1.5 hole 0.9: 1(0,0)
  round 1.5 hole 0.9: 2(2.54,0)
  silkscreen extent -1.27,-1.27 3.81,1.27
HDR1X3 [mm] "Connector; Header; 3 Position"
  rect 1.5x1.5 hole 0.9: 1(0,0)
  round 1.5 hole 0.9: 2(2.54,0) 3(5.08,0)
  silkscreen extent -1.27,-1.27 6.35,1.27
HDR1X6 [mm] "Connector; Header; 6 Position"
  rect 1.5x1.5 hole 0.9: 1(0,0)
  round 1.5 hole 0.9: 2(2.54,0) 3(5.08,0) 4(7.62,0) 5(10.16,0) 6(12.7,0)
  silkscreen extent -1.27,-1.27 13.97,1.27
HDR2X3 [mm] "Connector; Header; 3x2 Position"
  rect 1.5x1.5 hole 0.9: 1(0,0)
  round 1.5 hole 0.9: 2(0,2.54) 3(2.54,0) 4(2.54,2.54) 5(5.08,0) 6(5.08,2.54)
  silkscreen extent -1.27,-1.27 6.35,3.81
HDR2X4 [mm] "Connector; Header; 4x2 Position"
  rect 1.5x1.5 hole 0.9: 1(0,0)
  round 1.5 hole 0.9: 2(0,2.54) 3(2.54,0) 4(2.54,2.54) 5(5.08,0) 6(5.08,2.54) 7(7.62,0) 8(7.62,2.54)
  silkscreen extent -1.27,-1.27 8.89,3.81
LED-1206 [mil]
  rect 47.24x55.12 smd: A(-59.06,0) C(59.06,0)
  silkscreen extent -94,-39 94,39
"NDK NX3225SA" [mm] "Crystal, 4-Leads, Body 2.50x3.20mm, Pitch 2.20mm, IPC Medium Density"
  rect 1.4x1.2 smd: 1(-1.1,-0.8) 2(1.1,-0.8) 3(1.1,0.8) 4(-1.1,0.8)
  silkscreen extent -2.25,-1.85 2.1,1.7, body extent -1.61,-1.26 1.61,1.26, height 0.6
PAD-JUMPER-2-NO_YES_SILK [mil]
  rect 25x50 smd: 1(-17.72,0) 2(17.72,0)
  silkscreen extent -40,-39 40,39
PAD-JUMPER-3-NO_YES_SILK [mil]
  rect 25x50 smd: 1(-32,0) 2(0,0) 3(32,0)
  silkscreen extent -60,-40 60,40
PANASONIC_D [mm]
  rect 3x1.4 smd: +(2.4,0) -(-2.4,0)
  silkscreen extent -3.25,-3.25 3.25,3.25
R2512 [mil]
  rect 70.87x125.98 smd: 1(-110.24,0) 2(110.24,0)
SO08 [mil]
  rect 80x26 smd: 1(-121,75) 2(-121,25) 3(-121,-25) 4(-121,-75) 5(121,-75) 6(121,-25) 7(121,25) 8(121,75)
SOIC-SN8_N [mm] "SOIC, 8-Leads, Body 4.9x3.8mm, Pitch 1.27mm, IPC Medium Density"
  oval 2.2x0.6 smd: 1(-2.4,1.905) 2(-2.4,0.635) 3(-2.4,-0.635) 4(-2.4,-1.905) 5(2.4,-1.905) 6(2.4,-0.635) 7(2.4,0.635) 8(2.4,1.905)
  silkscreen extent -2.52,-2.5 0.9,2.88, body extent -2,-2.5 2,2.5, height 1.75
SOIC-SO18_N [mm] "SOIC, 18-Leads, Body 11.5x7.5mm, Pitch 1.27mm, IPC Medium Density"
  oval 2.3x0.6 smd: 1(-4.55,5.08) 2(-4.55,3.81) 3(-4.55,2.54) 4(-4.55,1.27) 5(-4.55,0) 6(-4.55,-1.27) 7(-4.55,-2.54) 8(-4.55,-3.81) 9(-4.55,-5.08) 10(4.55,-5.08) 11(4.55,-3.81) 12(4.55,-2.54) 13(4.55,-1.27) 14(4.55,0) 15(4.55,1.27) 16(4.55,2.54) 17(4.55,3.81) 18(4.55,5.08)
  silkscreen extent -4.67,-5.9 3,6.05, body extent -3.8,-5.95 3.8,5.95, height 2.65
"TE FSMSMTR" [mm]
  rrect50% 1.6x2.19 smd: 1(0,4.595) 2(0,-4.595)
  silkscreen extent -1.78,-3.18 1.78,3.18, body extent -1.75,-4.98 1.75,4.98, height 4.42
WJ45C-B-2P [mm]
  oval 5x8 hole 2: 1(0,0) 2(9.5,0)
  silkscreen extent -6,-8 15.5,8

## Part data
5V L1: library part LED1206
C1 C3 C4 C5 C6 C7 C8 C9 C10 C11 C12 C13 C14_S1 C14_S2 C14_S3 C14_S4 C14_S5 C14_S6 C14_S7 C14_S8 C14_S9 C14_S10 C14_S11 C14_S12 C14_S13 C14_S14: library part CAP0805
C2: library part 47UF-50V-20%(ELECT), PROD_ID=CAP-10547
CS_J1: "Header, 2-Pin", LatestRevisionDate=17-Jul-2002, LatestRevisionNote="Re-released for DXP Platform.", Publisher="Altium Limited"
END_CAN1: "Header, 3-Pin", LatestRevisionDate=17-Jul-2002, LatestRevisionNote="Re-released for DXP Platform.", Publisher="Altium Limited"
IC1_S1 IC1_S2 IC1_S3 IC1_S4 IC1_S5 IC1_S6 IC1_S7 IC1_S8 IC1_S9 IC1_S10 IC1_S11 IC1_S12 IC1_S13 IC1_S14: library part INA219-SO8D
ISCP1: "Header, 3-Pin, Dual row", LatestRevisionDate=17-Jul-2002, LatestRevisionNote="Re-released for DXP Platform.", Publisher="Altium Limited"
M_C1 M_C2 M_C3 M_C4 M_C5 M_C6 M_C7 M_C8 M_C9 M_C10 M_C11 M_C12 M_C13 M_C14: "TERM BLOCK HDR 2POS R/A 3.81MM", Colour=Green, Manufacturer=FCI, Supplier Part Number 1=609-3819-ND, TemperatureRange="-40C ~ 115C", Voltage=300V, ComponentLink1Description=Datasheet, ComponentLink1URL=http://portal.fciconnect.com/Comergent//fci/drawing/20020110.pdf, ComponentLink2Description="Digi-Key Listing", ComponentLink2URL=http://www.digikey.ca/product-detail/en/20020110-D021A01LF/609-3819-ND/2261255, Number Of Levels=1, Number Of Positions=2, Orientation="90, Right Angle", PartId=7785, Part Number=20020110-D021A01LF, Pitch="0.150\" (3.81mm)", Positions Per Level=2, Price=0,75, Supplier 1=Digi-Key, Type="Through Hole"
MCP1: "High-Speed CAN Transceiver, 8-Pin SOIC, Industrial Temperature, Tape and Reel", Supplier Part Number 1=MCP2551T-I/SNTR-ND, Code_IPC=SOIC127P600-8, Code_JEDEC=MS-012, ComponentLink1Description=Datasheet, ComponentLink1URL=http://ww1.microchip.com/downloads/en/DeviceDoc/21667E.pdf, ComponentLink2Description="Packaging Specification", ComponentLink2URL=http://www.microchip.com/stellent/groups/techpub_sg/documents/packagingspec/en012702.pdf, ComponentLink3Description="Microchip.com Home", ComponentLink3URL=http://www.microchip.com/, DatasheetVersion="revE, Jan-2007", PackageDescription="8-Lead Plastic Small Outline (SN) - Narrow, 3.90mm Body [SOIC]", PackageReference=SOIC-SN8, PackageVersion="revBB, Aug-2009", Published=29-Jan-2009, Publisher="Altium Limited", Supplier 1=Digi-Key, Supplier 2=Farnell, Supplier Part Number 2=1788569
MCP2: "Stand-Alone CAN Controller With SPI Interface, 18-Pin SOIC, Extended Temperature, Tape and Reel", Supplier Part Number 1=MCP2515T-E/SO-ND, Code_JEDEC=MS-013, ComponentLink1Description=Datasheet, ComponentLink1URL=http://ww1.microchip.com/downloads/en/DeviceDoc/21801e.pdf, ComponentLink2Description="Packaging Specification", ComponentLink2URL=http://www.microchip.com/stellent/groups/techpub_sg/documents/packagingspec/en012702.pdf, ComponentLink3Description="Microchip.com Home", ComponentLink3URL=http://www.microchip.com/, DatasheetVersion="revE, Nov-2007", PackageDescription="18-Lead Plastic Small Outline (SO) - Wide 7.50mm Body [SOIC]", PackageReference=SOIC-SO18, PackageVersion="revBB, Aug-2009", Published=29-Jan-2009, Publisher="Altium Limited", Supplier 1=Digi-Key
P1 P2: "Header, 4-Pin, Dual row", LatestRevisionDate=17-Jul-2002, LatestRevisionNote="Re-released for DXP Platform.", Publisher="Altium Limited"
Prog1: "Header, 6-Pin", LatestRevisionDate=17-Jul-2002, LatestRevisionNote="Re-released for DXP Platform.", Publisher="Altium Limited"
R1 R2 R3 R4 R5 R6 R7 R8 R9: library part RESISTOR0805-RES
R10_S1 R10_S2 R10_S3 R10_S4 R10_S5 R10_S6 R10_S7 R10_S8 R10_S9 R10_S10 R10_S11 R10_S12 R10_S13 R10_S14: library part RESISTOR2512
S1: "SWITCH TACTILE SPST-NO 0.05A 24V", Contact Rating @ Voltage="0.05A @ 24VDC", Illumination Type, Colour=-, Manufacturer="TE Connectivity Alcoswitch Switches", Operating Force=180gf, Operating Temperature="-35C ~ 85C", Supplier Part Number 1=450-1758-2-ND, Actuator Orientation="Top Actuated", Actuator Type=Standard, Circuit=SPST-NO, ComponentLink1Description=Datasheet, ComponentLink1URL=http://www.te.com/commerce/DocumentDelivery/DDEController?Action=srchrtrv&DocNm=1437566-3&DocType=Customer+Drawing&DocLang=English, ComponentLink2Description="Digi-Key Listing", ComponentLink2URL=http://www.digikey.com/product-detail/en/FSMSMTR/450-1758-2-ND/529671, Illumination=Non-Illuminated, Illumination Voltage=-, Mechanical Life="20,000 Cycles", PartId=8251, Part Number=FSMSMTR, Price=0,175, Supplier 1=Digi-Key, Switch Function=Off-Mom, Switch Travel=0.25mm
U1: "8-bit AVR Microcontroller, 32KB Flash, 1KB EEPROM, 2KB SRAM, 32-pin TQFP, Industrial Grade (-40°C to 85°C)", Supplier Part Number 1=ATMEGA328P-AU-ND, Code_JEDEC=MS-026-ABA, ComponentLink1Description="Manufacturer Link", ComponentLink1URL=http://www.atmel.com/products/avr/default.asp?, ComponentLink2Description="ATmega48A/48PA/88A/88PA/168A/168PA/328/328P Datasheet", ComponentLink2URL=http://www.atmel.com/dyn/resources/prod_documents/8271.pdf, ComponentLink3Description="ATmega48A/48PA/88A/88PA/168A/168PA/328/328P Summary", ComponentLink3URL=http://www.atmel.com/dyn/resources/prod_documents/8271S.pdf, ComponentLink4Description="Atmel.com Home", ComponentLink4URL=http://www.atmel.com, DatasheetVersion="revA, Jan-2010", PackageDescription="32-Lead, 7x7x1.0 mm Body, 0.8mm Lead Pitch, Thin Profile Plastic Quad Flat Package (TQFP)", PackageReference=32A, PackageVersion="revB, Oct-2001", Published=1-Apr-2010, Publisher="Altium Limited", Supplier 1=Digi-Key, Supplier 2=Farnell, Supplier 3=Mouser, Supplier Part Number 2=1715486, Supplier Part Number 3=556-ATMEGA328P-AU
Y1 Y2: library part NX3225SA-16.000MHZ-STD-CSR-1, "CRYSTAL 16.0000MHZ 8PF SMD", Device Package="4-SMD, No Lead (DFN, LCC)", Frequency Stability=15ppm, Load Capacitance=8pF, Manufacturer=NDK, Operating Mode=Fundamental, Supplier Part Number 1=644-1049-2-ND, ComponentLink1Description=Datasheet, ComponentLink1URL=http://media.digikey.com/pdf/Data%20Sheets/NDK%20PDFs/NX3225SA.pdf, ComponentLink2Description="Digi-Key Listing", ComponentLink2URL=http://www.digikey.com/product-detail/en/NX3225SA-16.000MHZ-STD-CSR-1/644-1049-2-ND/1128831, ESR="80 Ohm", Frequency=16MHz, Frequency Tolerance=15ppm, PartId=8509, Part Number=NX3225SA-16.000MHZ-STD-CSR-1, Price=0,3799, Supplier 1=Digi-Key, Type="MHz Crystal"

## Free pads (board coordinates)
  round 236.22 hole 129.92: 7(157.48,551.18) 9(157.48,2244.09) 10(3740.16,551.18) 10(3740.16,2244.09)
  round 157.48 hole 78.74: 12(3100,800) 13(320,800) 14(800,800) 15(1240,800) 16(1700,800) 17(2180,800) 18(2640,800) 19(3410.02,1359.74) 19(3510.02,1919.74) 19(3510.02,2259.74) 19(3550.02,459.74) 26(3100,1960) 27(2640,1960) 28(2180,1960) 29(1720,1960) 30(1260,1960) 31(800,1960)
  round 78.74 hole 59.06: 34(3100,2320) 35(3360,2340)

## Nets (pads, with @x,y where several pads share a name; then routed paths per layer and width w, separated by ;. In a path a pad name is that pad's centre, name@x,y a point inside that pad or via, vN(x,y) a via of type N, cw(c..) or ccw(c..) an arc to the next point about the centre after c; other vN are vias at no path point)
5V: C2.+ C4.1 C5.1 C6.1 C10.1 C11.1 C14_S1.1 C14_S2.1 C14_S3.1 C14_S4.1 C14_S5.1 C14_S6.1 C14_S7.1 C14_S8.1 C14_S9.1 C14_S10.1 C14_S11.1 C14_S12.1 C14_S13.1 C14_S14.1 IC1_S1.5 IC1_S2.5 IC1_S3.5 IC1_S4.5 IC1_S5.5 IC1_S6.5 IC1_S7.5 IC1_S8.5 IC1_S9.5 IC1_S10.5 IC1_S11.5 IC1_S12.5 IC1_S13.5 IC1_S14.5 ISCP1.2 JP2_S1.1 JP2_S2.1 JP2_S3.1 JP2_S4.1 JP2_S5.1 JP2_S6.1 JP2_S7.1 JP2_S8.1 JP2_S9.1 JP2_S10.1 JP2_S11.1 JP2_S12.1 JP2_S13.1 JP2_S14.1 JP4_S1.1 JP4_S2.1 JP4_S3.1 JP4_S4.1 JP4_S5.1 JP4_S6.1 JP4_S7.1 JP4_S8.1 JP4_S9.1 JP4_S10.1 JP4_S11.1 JP4_S12.1 JP4_S13.1 JP4_S14.1 MCP1.3 MCP2.18 P1.1 P2.1 Prog1.1 R1.2 R2.2 R3.1 R4.2 R5.2 R7.2 U1.4 U1.6 U1.18
24V: IC1_S1.8 IC1_S2.8 IC1_S3.8 IC1_S4.8 IC1_S5.8 IC1_S6.8 IC1_S7.8 IC1_S8.8 IC1_S9.8 IC1_S10.8 IC1_S11.8 IC1_S12.8 IC1_S13.8 IC1_S14.8 pad.12 pad.13 pad.14 pad.15 pad.16 pad.17 pad.18 pad.26 pad.27 pad.28 pad.29 pad.30 pad.31 pad.34 pad.35 R10_S1.2 R10_S2.2 R10_S3.2 R10_S4.2 R10_S5.2 R10_S6.2 R10_S7.2 R10_S8.2 R10_S9.2 R10_S10.2 R10_S11.2 R10_S12.2 R10_S13.2 R10_S14.2 WJ45C-B-2P.2 | length 13737.8
  Top Layer w70: pad.13 320,454.76 R10_S8.2 ; R10_S1.2 800,2320 pad.31 ; pad.14 800,434.76 R10_S9.2 ; R10_S2.2 1260,2320 pad.30 ; pad.15 1240,454.76 R10_S10.2 ; R10_S3.2 1720,2320.48 pad.29 ; pad.16 1700,451.76 R10_S11.2 ; R10_S4.2 2180,2320.48 pad.28 ; pad.17 2180,433.76 R10_S12.2 ; R10_S5.2 2640,2320 pad.27 ; pad.18 2640,437.76 R10_S13.2 ; R10_S6.2 3100,2320.48 pad.34 pad.26 ; pad.12 3100,434.76 R10_S14.2 ; pad.35 R10_S7.2
  Top Layer w150: pad.12 3100,840 3220,960 3220,1554.02 ; pad.26 3220,1840 3220,1554.02 ; WJ45C-B-2P.2 3220,1554.02
  Bottom Layer w70: pad.34 3260,2320 pad.35
  Bottom Layer w150: pad.13 pad.14 pad.15 pad.16 pad.17 pad.18 pad.12 ; pad.31 pad.30 pad.29 pad.28 pad.27 pad.26
AREF: C7.1 U1.20
C_CS: CS_J1.1 U1.14
CANH: MCP1.7 P1.5 P2.5 R6.1
CANL: END_CAN1.2 MCP1.6 P1.6 P2.6
CTAL1: C12.1 MCP2.8 Y2.1
CTAL2: C13.1 MCP2.7 Y2.3
GND: 5V.C C2.- C3.2 C4.2 C5.2 C6.2 C7.2 C8.2 C9.2 C10.2 C11.2 C12.2 C13.2 C14_S1.2 C14_S2.2 C14_S3.2 C14_S4.2 C14_S5.2 C14_S6.2 C14_S7.2 C14_S8.2 C14_S9.2 C14_S10.2 C14_S11.2 C14_S12.2 C14_S13.2 C14_S14.2 IC1_S1.6 IC1_S2.6 IC1_S3.6 IC1_S4.6 IC1_S5.6 IC1_S6.6 IC1_S7.6 IC1_S8.6 IC1_S9.6 IC1_S10.6 IC1_S11.6 IC1_S12.6 IC1_S13.6 IC1_S14.6 ISCP1.6 JP1_S1.1 JP1_S2.1 JP1_S3.1 JP1_S4.1 JP1_S5.1 JP1_S6.1 JP1_S7.1 JP1_S8.1 JP1_S9.1 JP1_S10.1 JP1_S11.1 JP1_S12.1 JP1_S13.1 JP1_S14.1 JP3_S1.1 JP3_S2.1 JP3_S3.1 JP3_S4.1 JP3_S5.1 JP3_S6.1 JP3_S7.1 JP3_S8.1 JP3_S9.1 JP3_S10.1 JP3_S11.1 JP3_S12.1 JP3_S13.1 JP3_S14.1 JP9.2 JP10.2 L1.C M_C1.2 M_C2.2 M_C3.2 M_C4.2 M_C5.2 M_C6.2 M_C7.2 M_C8.2 M_C9.2 M_C10.2 M_C11.2 M_C12.2 M_C13.2 M_C14.2 MCP1.2 MCP2.9 pad.19 Prog1.2 R8.1 S1.2 U1.3 U1.5 U1.21 WJ45C-B-2P.1 Y1.2 Y1.4 Y2.2 Y2.4 | length 10415.8
  Top Layer w150: pad.19@3420,1360 3600,1180 WJ45C-B-2P.1 3511.15,1051.15 3511.15,498.6 pad.19@3550.02,459.74 ; pad.19@3510.02,1919.74 pad.19@3510.02,2259.74
  Bottom Layer w70: M_C8.2 485,295 ; 635,2475.02 M_C1.2 ; M_C9.2 945,295 ; 1095,2465 M_C2.2 ; M_C10.2 1405,295 ; 1555,2465 M_C3.2 ; M_C11.2 1865,295 ; 2015,2465 M_C4.2 ; M_C12.2 2325,295 ; 2475,2465 M_C5.2 ; 2780,300 2785,295 M_C13.2 ; 2935,2465 M_C6.2 ; M_C14.2 3245,295 ; 3395,2525 M_C7.2
  Bottom Layer w150: 480,300 2780,300 3390.28,300 pad.19@3550.02,459.74 ; 650.02,2460 3216.81,2460 3218.99,2462.18 3395,2462.18 ; pad.19@3410.02,1359.74 3410.02,1471.2 3401.52,1479.7 3401.52,1821.52 pad.19@3500,1920 ; 3423.19,2460 3460,2460 3510.02,2409.98 pad.19@3510.02,2259.74
INT: MCP2.12 U1.13
LED1: R9.2 U1.12
M_S1: IC1_S1.7 M_C1.1 R10_S1.1 | length 212.3
  Top Layer w70: R10_S1.1 479.52,2580 485,2585.48 M_C1.1
M_S2: IC1_S2.7 M_C2.1 R10_S2.1 | length 204.5
  Top Layer w70: R10_S2.1 M_C2.1@939.52,2624.52
M_S3: IC1_S3.7 M_C3.1 R10_S3.1 | length 205
  Top Layer w70: R10_S3.1 M_C3.1@1400,2625
M_S4: IC1_S4.7 M_C4.1 R10_S4.1 | length 205
  Top Layer w70: R10_S4.1 M_C4.1@1860,2625
M_S5: IC1_S5.7 M_C5.1 R10_S5.1 | length 204.5
  Top Layer w70: R10_S5.1 M_C5.1@2319.52,2624.52
M_S6: IC1_S6.7 M_C6.1 R10_S6.1 | length 205
  Top Layer w70: R10_S6.1 M_C6.1@2780,2625
M_S7: IC1_S7.7 M_C7.1 R10_S7.1 | length 205
  Top Layer w70: R10_S7.1 M_C7.1@3240,2625
M_S8: IC1_S8.7 M_C8.1 R10_S8.1 | length 177.8
  Top Layer w70: M_C8.1@661.24,156.24 R10_S8.1
M_S9: IC1_S9.7 M_C9.1 R10_S9.1 | length 177.8
  Top Layer w70: M_C9.1@1121.24,156.24 R10_S9.1
M_S10: IC1_S10.7 M_C10.1 R10_S10.1 | length 179.8
  Top Layer w70: M_C10.1@1580.24,155.24 R10_S10.1
M_S11: IC1_S11.7 M_C11.1 R10_S11.1 | length 178.8
  Top Layer w70: M_C11.1@2039.24,154.24 R10_S11.1
M_S12: IC1_S12.7 M_C12.1 R10_S12.1 | length 178.8
  Top Layer w70: M_C12.1@2500.24,155.24 R10_S12.1
M_S13: IC1_S13.7 M_C13.1 R10_S13.1 | length 172.8
  Top Layer w70: M_C13.1@2965.24,160.24 R10_S13.1
M_S14: IC1_S14.7 M_C14.1 R10_S14.1 | length 177.8
  Top Layer w70: M_C14.1@3421.24,156.24 R10_S14.1
MISO: ISCP1.3 MCP2.15 U1.16
MOSI: ISCP1.4 MCP2.14 U1.15
Net5V_A: 5V.A R2.1
NetC1_2: C1.2 Prog1.5
NetCS_J1_2: CS_J1.2 MCP2.16
NetEND_CAN1_1: END_CAN1.1 R6.2
NetIC1_S1_1: IC1_S1.1 JP1_S1.2 JP2_S1.2
NetIC1_S1_2: IC1_S1.2 JP3_S1.2 JP4_S1.2
NetIC1_S2_1: IC1_S2.1 JP1_S2.2 JP2_S2.2
NetIC1_S2_2: IC1_S2.2 JP3_S2.2 JP4_S2.2
NetIC1_S3_1: IC1_S3.1 JP1_S3.2 JP2_S3.2
NetIC1_S3_2: IC1_S3.2 JP3_S3.2 JP4_S3.2
NetIC1_S4_1: IC1_S4.1 JP1_S4.2 JP2_S4.2
NetIC1_S4_2: IC1_S4.2 JP3_S4.2 JP4_S4.2
NetIC1_S5_1: IC1_S5.1 JP1_S5.2 JP2_S5.2
NetIC1_S5_2: IC1_S5.2 JP3_S5.2 JP4_S5.2
NetIC1_S6_1: IC1_S6.1 JP1_S6.2 JP2_S6.2
NetIC1_S6_2: IC1_S6.2 JP3_S6.2 JP4_S6.2
NetIC1_S7_1: IC1_S7.1 JP1_S7.2 JP2_S7.2
NetIC1_S7_2: IC1_S7.2 JP3_S7.2 JP4_S7.2
NetIC1_S8_1: IC1_S8.1 JP1_S8.2 JP2_S8.2
NetIC1_S8_2: IC1_S8.2 JP3_S8.2 JP4_S8.2
NetIC1_S9_1: IC1_S9.1 JP1_S9.2 JP2_S9.2
NetIC1_S9_2: IC1_S9.2 JP3_S9.2 JP4_S9.2
NetIC1_S10_1: IC1_S10.1 JP1_S10.2 JP2_S10.2
NetIC1_S10_2: IC1_S10.2 JP3_S10.2 JP4_S10.2
NetIC1_S11_1: IC1_S11.1 JP1_S11.2 JP2_S11.2
NetIC1_S11_2: IC1_S11.2 JP3_S11.2 JP4_S11.2
NetIC1_S12_1: IC1_S12.1 JP1_S12.2 JP2_S12.2
NetIC1_S12_2: IC1_S12.2 JP3_S12.2 JP4_S12.2
NetIC1_S13_1: IC1_S13.1 JP1_S13.2 JP2_S13.2
NetIC1_S13_2: IC1_S13.2 JP3_S13.2 JP4_S13.2
NetIC1_S14_1: IC1_S14.1 JP1_S14.2 JP2_S14.2
NetIC1_S14_2: IC1_S14.2 JP3_S14.2 JP4_S14.2
NetJP5_2: JP5.2 P1.3
NetJP6_1: JP6.1 P1.4
NetJP7_2: JP7.2 P2.3
NetJP8_1: JP8.1 P2.4
NetJP9_1: JP9.1 P1.2
NetJP10_1: JP10.1 P2.2
NetL1_A: L1.A R9.1
NetMCP1_1: MCP1.1 MCP2.1
NetMCP1_4: MCP1.4 MCP2.2
NetMCP1_8: MCP1.8 R8.2
NetMCP2_17: MCP2.17 R7.1
RESET: C1.1 C3.1 ISCP1.5 R1.1 R3.2 S1.1 U1.29
RXP: Prog1.4 U1.31
SCK: ISCP1.1 MCP2.13 U1.17
SCL: IC1_S1.4 IC1_S2.4 IC1_S3.4 IC1_S4.4 IC1_S5.4 IC1_S6.4 IC1_S7.4 IC1_S8.4 IC1_S9.4 IC1_S10.4 IC1_S11.4 IC1_S12.4 IC1_S13.4 IC1_S14.4 JP2_S1.3 JP2_S2.3 JP2_S3.3 JP2_S4.3 JP2_S5.3 JP2_S6.3 JP2_S7.3 JP2_S8.3 JP2_S9.3 JP2_S10.3 JP2_S11.3 JP2_S12.3 JP2_S13.3 JP2_S14.3 JP4_S1.3 JP4_S2.3 JP4_S3.3 JP4_S4.3 JP4_S5.3 JP4_S6.3 JP4_S7.3 JP4_S8.3 JP4_S9.3 JP4_S10.3 JP4_S11.3 JP4_S12.3 JP4_S13.3 JP4_S14.3 JP5.1 JP7.1 R4.1 U1.28
SDA: IC1_S1.3 IC1_S2.3 IC1_S3.3 IC1_S4.3 IC1_S5.3 IC1_S6.3 IC1_S7.3 IC1_S8.3 IC1_S9.3 IC1_S10.3 IC1_S11.3 IC1_S12.3 IC1_S13.3 IC1_S14.3 JP1_S1.3 JP1_S2.3 JP1_S3.3 JP1_S4.3 JP1_S5.3 JP1_S6.3 JP1_S7.3 JP1_S8.3 JP1_S9.3 JP1_S10.3 JP1_S11.3 JP1_S12.3 JP1_S13.3 JP1_S14.3 JP3_S1.3 JP3_S2.3 JP3_S3.3 JP3_S4.3 JP3_S5.3 JP3_S6.3 JP3_S7.3 JP3_S8.3 JP3_S9.3 JP3_S10.3 JP3_S11.3 JP3_S12.3 JP3_S13.3 JP3_S14.3 JP6.2 JP8.2 R5.1 U1.27
SOS: P1.8 P2.8 U1.23
TXP: Prog1.3 U1.30
XTAL1: C8.1 U1.7 Y1.1
XTAL2: C9.1 U1.8 Y1.3
pads on no net: END_CAN1.3 MCP1.5 MCP2.3 MCP2.4 MCP2.5 MCP2.6 MCP2.10 MCP2.11 P1.7 P2.7 Prog1.6 U1.1 U1.2 U1.9 U1.10 U1.11 U1.19 U1.22 U1.24 U1.25 U1.26 U1.32

## Silkscreen, mask and mechanical layers (free items; w line width, h text height)
Mechanical 2:
  lines w7.87: -5760,-17215 -5760,-15445.01 -5760,-15040.99 -5760,-14907.45 -5760,-14851.7 -5760,-14835.1 -5760,-14828.5 -5760,-14826.59 -5760,-14825.5 -5700.91,-14762.47 -5639.83,-14701.39 -5576.8,-14642.3 -2006.2,-14642.3 -1943.16,-14701.39 -1882.08,-14762.47 -1822.99,-14825.5 -1822.99,-14826.59 -1822.99,-17215 -1882.08,-17278.03 -1943.16,-17339.12 -2006.2,-17398.2 -2006.59,-17398.2 -3759.23,-17398.2 -4888.89,-17398.2 -5306.3,-17398.2 -5488.61,-17398.2 -5544.2,-17398.2 -5566.56,-17398.2 -5573.08,-17398.2 -5575.64,-17398.2 -5576.8,-17398.2 -5639.83,-17339.12 -5700.91,-17278.03 -5760,-17215 ; -0.63,184.23 -0.63,1954.22 -0.63,2358.24 -0.63,2491.78 -0.63,2547.53 -0.63,2564.13 -0.63,2570.73 -0.63,2572.64 -0.63,2573.72 58.46,2636.76 119.54,2697.84 182.57,2756.93 3753.17,2756.93 3816.21,2697.84 3877.29,2636.76 3936.38,2573.72 3936.38,2572.64 3936.38,184.23 3877.29,121.2 3816.21,60.11 3753.17,1.02 3752.78,1.02 2000.14,1.02 870.48,1.02 453.07,1.02 270.76,1.02 215.17,1.02 192.81,1.02 186.29,1.02 183.73,1.02 182.57,1.02 119.54,60.11 58.46,121.2 -0.63,184.23

## Text inside footprints (layer, text, board x,y; h text height)
ISCP1: Top Overlay "6" at 1840,960 h39.37 r180; Top Overlay "5" at 1840,1060 h39.37 r180; Top Overlay "2" at 2200,960 h39.37 r180; Top Overlay "1" at 2180,1060 h39.37 r180
P1: Top Overlay "2" at 158.37,1904.23 h39.37 r270; Top Overlay "1" at 58.37,1884.23 h39.37 r270; Top Overlay "7" at 58.37,1444.23 h39.37 r270; Top Overlay "8" at 158.37,1444.23 h39.37 r270
P2: Top Overlay "2" at 158.37,1344.23 h39.37 r270; Top Overlay "1" at 58.37,1324.23 h39.37 r270; Top Overlay "7" at 58.37,884.23 h39.37 r270; Top Overlay "8" at 158.37,884.23 h39.37 r270